# Altium PCB PCB2.PcbDoc
Units mm, origin at the board's own origin, x right, y up, seen from the top; angles counter-clockwise.
Board outline 62.64 x 44.93 mm, 2 copper layers (Top Layer, Bottom Layer), stack 1.1 mm thick; 47 components, 33 nets, 171 pads, 31 vias.
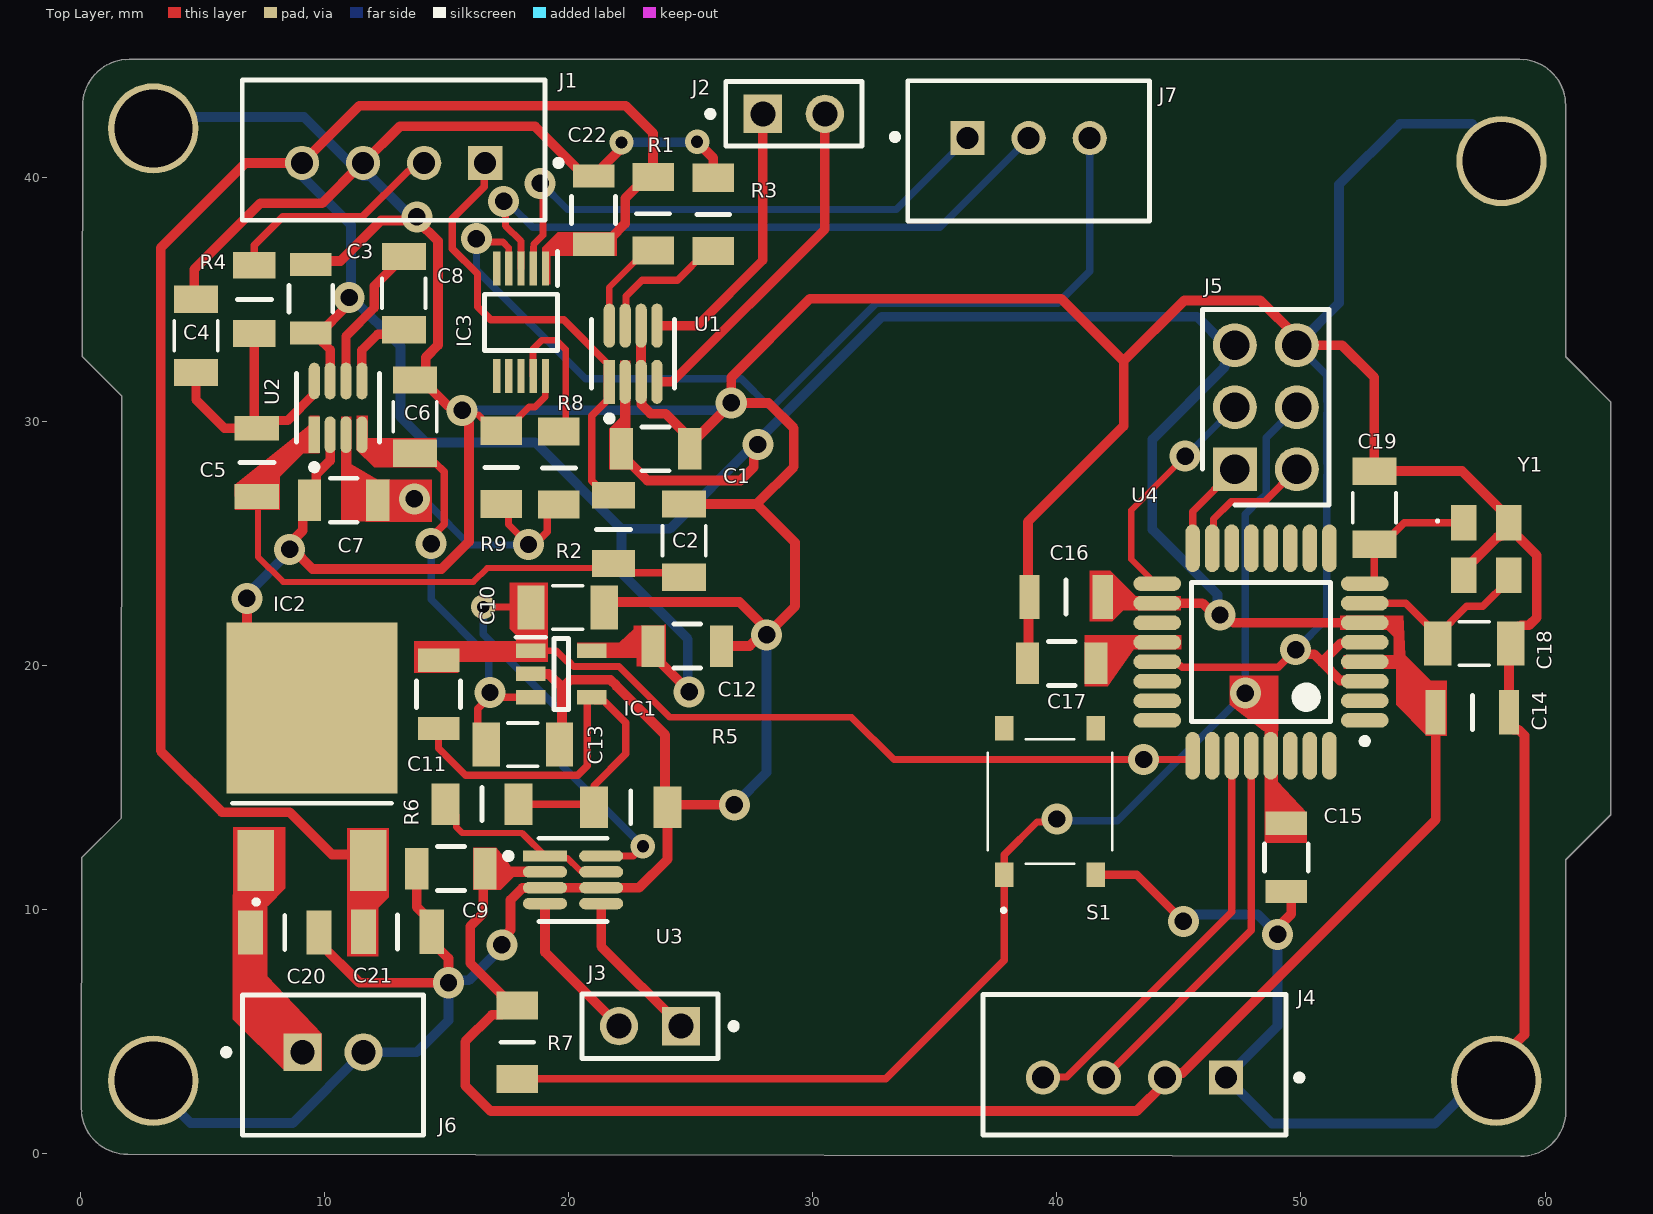
[diagram p0: Top Layer view]
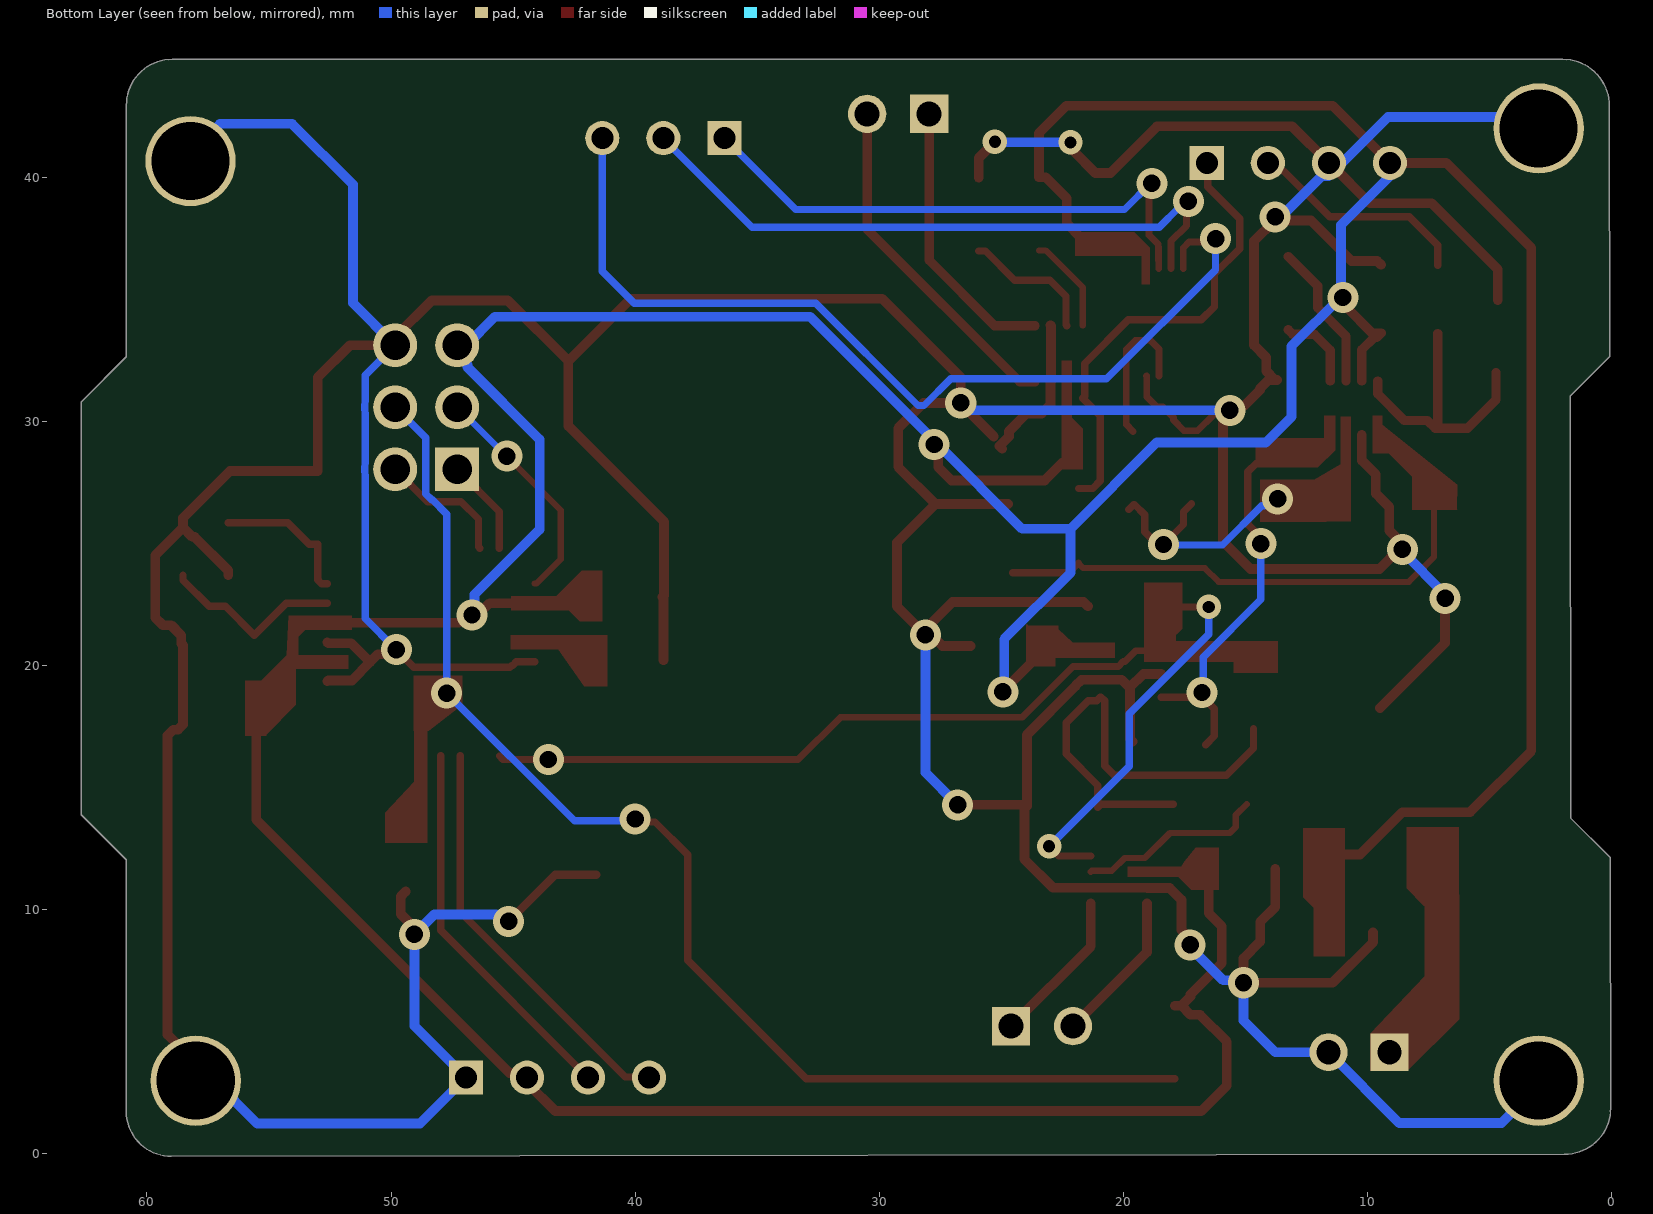
[diagram p1: Bottom Layer view, seen from below]
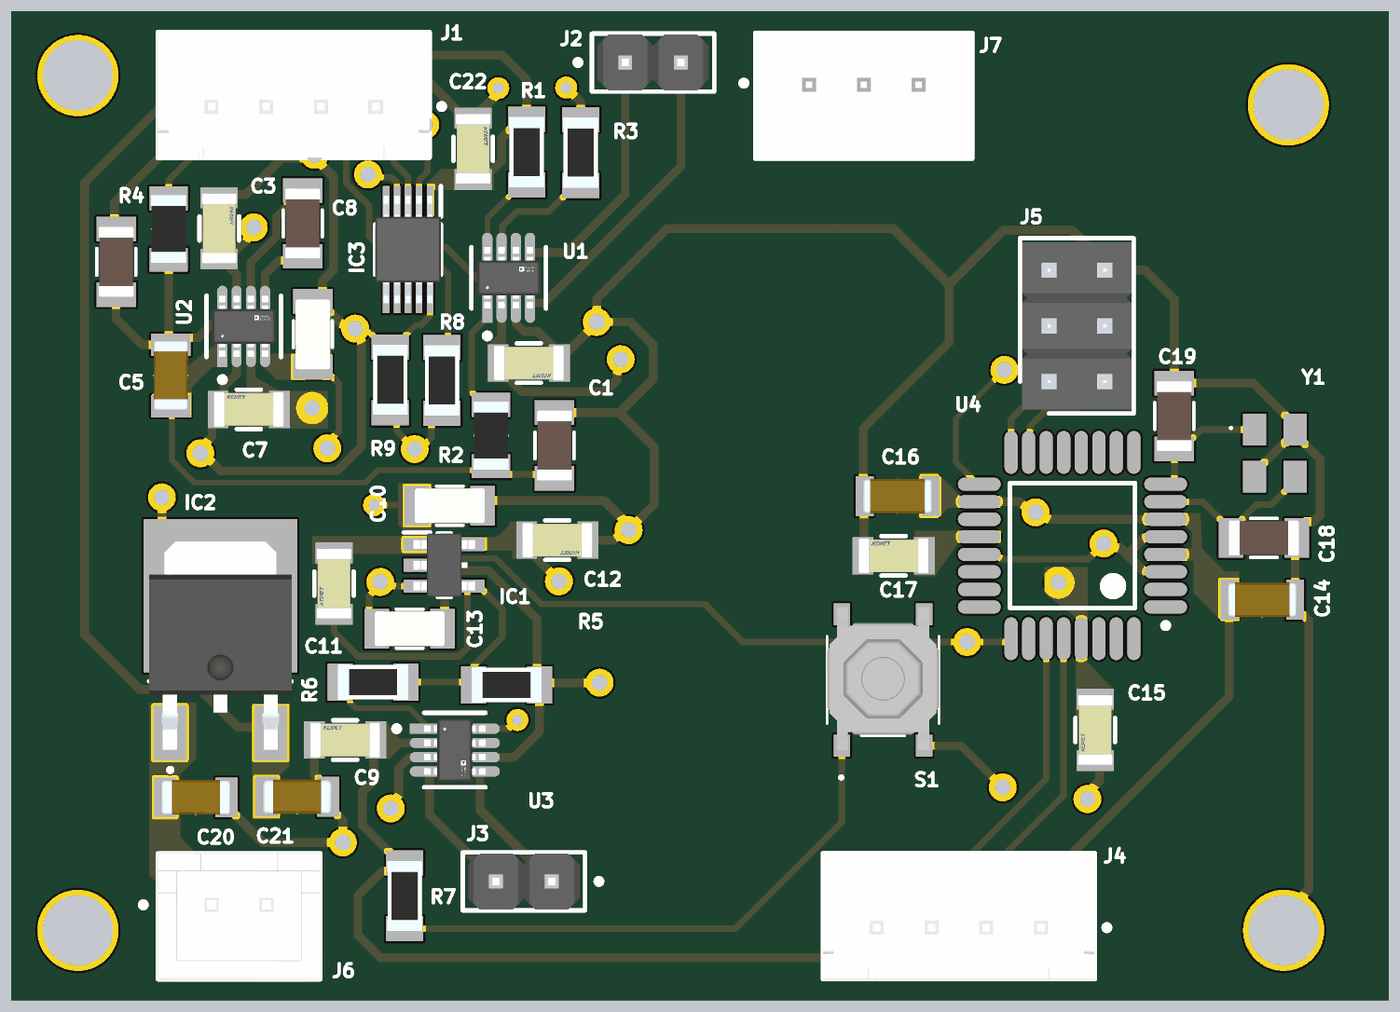
[diagram p2: 3D render of the assembled board from above, using the file's embedded part models]

## Layer stack, top to bottom
Top Solder: solder mask 0.05, Solder Resist, Dk 3.5
Top Layer: signal copper 0.1
Dielectric 1: dielectric 0.9, FR-4, Dk 4.8
Bottom Layer: signal copper 0.1
Bottom Solder: solder mask 0.05, Solder Resist, Dk 3.5

## Board outline
0.051,1.873 0.064,12.136 1.692,13.759 1.713,31.033 0.089,32.661 0.101,42.923 cw(c2.009,42.923) 2.009,44.831 16.247,44.831 44.723,44.831 58.961,44.831 cw(c58.961,42.948) 60.844,42.948 60.846,32.648 62.686,30.808 62.688,13.888 60.849,12.048 60.85,1.748 cw(c59.001,1.748) 59.001,-0.101 1.941,-0.017 cw(c1.941,1.873)

## Design rules (kind name [scope] priority, off if disabled: settings)
BoardOutlineClearance [All] p1: gap=0.2 ignorepadtopadclearanceinfootprint=FALSE except(0.4: Arc-SplitBarrior Arc-SplitContinuation Track-SplitBarrior Track-SplitContinuation SMDPad-SplitBarrior SMDPad-SplitContinuation THPad-SplitBarrior THPad-SplitContinuation Via-SplitBarrior Via-SplitContinuation Fill-SplitBarrior Fill-SplitContinuation Poly-SplitBarrior Poly-SplitContinuation Region-SplitBarrior Region-SplitContinuation Text-SplitBarrior Text-SplitContinuation)
Clearance "Clearance Bottom Layer" [OnLayer('Bottom Layer')] p1: gap=0.203 ignorepadtopadclearanceinfootprint=TRUE except(0.254: Arc-Text Track-Text SMDPad-Text THPad-Text Via-Text Fill-Text Poly-Text Region-Text Text-Text)
Clearance "Clearance Top Layer" [OnLayer('Top Layer')] p2: gap=0.203 ignorepadtopadclearanceinfootprint=TRUE except(0.254: Arc-Text Track-Text SMDPad-Text THPad-Text Via-Text Fill-Text Poly-Text Region-Text Text-Text)
Clearance [All] p3: gap=0.2 ignorepadtopadclearanceinfootprint=FALSE except(0.089: Arc-Arc Arc-Track Arc-SMDPad Track-Track Track-SMDPad SMDPad-SMDPad; 0.127: Arc-Via Track-Via SMDPad-Via THPad-Via Via-Via; 0.254: Arc-Text Track-Text SMDPad-Text THPad-Text Via-Text Fill-Text Poly-Text Region-Text Text-Text)
Clearance PowerNets [All vs InNet('GND')] p4: gap=15 ignorepadtopadclearanceinfootprint=FALSE
HoleSize [All] p1: absolutevalues=TRUE maxlimit=6.3 minlimit=0.2 maxpercent=80.000 minpercent=20.000
MinimumAnnularRing [All] p1: minimumring=0.076
MinimumSolderMaskSliver [All] p1: minsoldermaskwidth=0.1
PolygonConnect PolygonConnect_1 [All] p1: thpad.connectstyle=Relief thpad.reliefconductorwidth=0.508 thpad.reliefentries=4 thpad.polygonreliefangle="90 Angle" thpad.airgapwidth=0.254 smdpad.connectstyle=Relief smdpad.reliefconductorwidth=0.508 smdpad.reliefentries=4 smdpad.polygonreliefangle="90 Angle" smdpad.airgapwidth=0.254 via.connectstyle=Direct via.reliefconductorwidth=0.508 via.reliefentries=4 via.polygonreliefangle="90 Angle" via.airgapwidth=0.254
RoutingCorners [All] p1: cornerstyle=Round minsetback=2.54 maxsetback=2.54
RoutingVias [All] p1: holewidth=0.5 width=1 viastyle="Through Hole" minholewidth=0.2 minwidth=0.45 maxholewidth=1 maxwidth=2
SilkToSilkClearance [All] p1: silktosilkclearance=0.1
SilkToSolderMaskClearance [IsPad] p1: minsilkscreentomaskgap=0.1 clearancetoexposedcopper=TRUE
SolderMaskExpansion [All] p1: expansion=0.102 istentingtop=FALSE
SupplyNets "Schematic Supply Nets_3" [InNet('GND')] p1: voltage=0.000
SupplyNets "Schematic Supply Nets_2" [InNet('VCC')] p2: voltage=0.000
SupplyNets "Schematic Supply Nets_1" [InNet('VCC1')] p3: voltage=0.000
SupplyNets "Schematic Supply Nets" [InNet('REF')] p4: voltage=0.000
Width Width_PowerNets [InNetClass('PowerNets')] p1: maxlimit=0.4 minlimit=0.25 preferedwidth=0.35
Width [All] p2: maxlimit=2.54 minlimit=0.089 preferedwidth=0.381
25 further rules are at their usual default settings.

## Classes and differential pairs
net class PowerNets: GND VCC1
component class Offset: C22 IC3 J7 R8 R9
component class Power: C20 C21 IC2 J6
component class MicroController: C14 C15 C16 C17 C18 C19 J4 J5 R7 S1 U4 Y1
component class "Instrumentation amplifier": C3 C4 C5 C6 C7 C8 R4 U2
component class balancingBridge: C1 C2 J1 J2 R1 R2 R3 U1
component class Amplifier: C9 C10 C11 C12 C13 IC1 J3 R5 R6 U3

## Components (designator, comment, footprint, x,y, rotation, side; value= is the part's Value field where it differs from the comment)
C1 "0.1uF" FP-C1206C-EB-MFG 23.571,28.88 r180 top value="0.10 μF"
C2 "12063C224JAT2A" CAPC3216X94N 24.74,25.121 r270 top
C3 "0.1uF" FP-C1206C-EB-MFG 9.449,35.027 r270 top value="0.10 μF"
C4 "12063C224JAT2A" CAPC3216X94N 4.75,33.503 r270 top
C5 "12065C474JAT2A" CAPC3216X152N 7.239,28.321 r90 top
C6 "12063C334MAT2A" CAPC3216X127N 13.716,30.201 r270 top
C7 "0.1uF" FP-C1206C-EB-MFG 10.795,26.772 r0 top value="0.10 μF"
C8 "12063A4R7DAT2A" CAPC3216X94N 13.259,35.255 r270 top
C9 "0.1uF" FP-C1206C-EB-MFG 15.189,11.684 r0 top value="0.10 μF"
C10 "12063C334MAT2A" CAPC3216X127N 19.964,22.377 r0 top
C11 "0.1uF" FP-C1206C-EB-MFG 14.681,18.821 r90 top value="0.10 μF"
C12 "0.1uF" FP-C1206C-EB-MFG 24.867,20.803 r180 top value="0.10 μF"
C13 "12063C334MAT2A" CAPC3216X127N 18.136,16.764 r180 top
C14 "CGA5L1X7R1C106K160AC" CAPC3216X190N 57.023,18.085 r180 top
C15 "0.1uF" FP-C1206C-EB-MFG 49.403,12.144 r90 top value="0.10 μF"
C16 "CGA5L1X7R1C106K160AC" CAPC3216X190N 40.386,22.809 r0 top
C17 "0.1uF" FP-C1206C-EB-MFG 40.208,20.091 r0 top value="0.10 μF"
C18 "12063A220JAT2A" CAPC3216X94N 57.099,20.904 r180 top
C19 "12063A220JAT2A" CAPC3216X94N 53.01,26.467 r270 top
C20 "12063C105MAT2A" CAPC3216X178N 8.382,9.068 r180 top
C21 "12063D226MAT2A" CAPC3216X229N 13.005,9.093 r180 top
C22 "0.1uF" FP-C1206C-EB-MFG 21.031,38.659 r270 top value="0.10 μF"
IC1 "OPA336NA_3K" SOT95P280X145-5N 19.71,19.66 r0 top
IC2 "BD450M5FP-CE2" ROHM_TO-252-3 9.5,19.863 r0 top
IC3 "MCP4728-E_UN" SOP50P490X110-10N 18.059,34.061 r270 top
J1 "B4B-XH-A(LF)(SN)" FP-B4B-XH-A_LF_SN-MFG 12.843,41.114 r0 top
J2 "M20-9990246" FP-M20-9990246-MFG 29.235,42.596 r0 top
J3 "M20-9990246" FP-M20-9990246-MFG 23.343,5.232 r180 top
J4 "B4B-XH-A(LF)(SN)" FP-B4B-XH-A_LF_SN-MFG 43.185,3.649 r0 top
J5 "87914-0606" HDRV6W69P254_2X3_762X498X859P 47.295,28.042 r90 top
J6 "B2B-XH-A(LF)(SN)" FP-B2B-XH-A_LF_SN-MFG 10.358,3.641 r0 top
J7 "B3B-XH-A(LF)(SN)" FP-B3B-XH-A_LF_SN-MFG 38.851,41.08 r0 top
R1 "ERA-8AEB103V" RESC3216X70N 23.47,38.506 r270 top
R2 "CHP1206AFX-4701ELF" RESC3116X65N 21.844,25.578 r270 top
R3 "ERA-8AEB103V" RESC3216X70N 25.933,38.481 r270 top
R4 "CHP1206AFX-4701ELF" RESC3116X65N 7.137,34.998 r270 top
R5 "ERA8AEB102V" RESC3216X70N 22.555,14.199 r0 top
R6 "ERA-8AEB103V" RESC3216X70N 16.459,14.326 r0 top
R7 "ERA-8AEB103V" RESC3216X70N 17.907,4.572 r90 top
R8 "ERA-8AEB272V" RESC3216X70N 19.609,28.092 r270 top
R9 "ERA-8AEB103V" RESC3216X70N 17.247,28.119 r90 top
S1 "TS-1187A-B-A-B" TS1187ABAB 39.726,14.427 r90 top
U1 "AD5171BRJZ100-R2" FP-RJ-8-IPC_A 22.652,32.773 r90 top
U2 "AD8293G160ARJZ-R7" FP-RJ-8-IPC_B 10.566,30.556 r90 top
U3 "AD5171BRJZ100-R2" FP-RJ-8-IPC_A 20.193,11.227 r0 top
U4 "ATmega328P-AU" 32A_M 48.368,20.557 r180 top
Y1 "CX3225SA40000D0PTWCC" CX3225SA40000D0PTWCC 57.597,24.773 r270 top

## Footprints (in the part's own frame and the unit in brackets; to place one, negate y for a bottom-side part, rotate by r counter-clockwise, add the part's x,y. Pads: shape width x height; smd on the part's side, far side on the other; paste and mask are expansions set on the pad)
32A_M [mm] "Thin QFP, 32-Leads, Body 7x7mm, Pitch 0.8mm, IPC Low Density"
  oval 1.95x0.6 smd: 1(-4.25,2.8) 2(-4.25,2) 3(-4.25,1.2) 4(-4.25,0.4) 5(-4.25,-0.4) 6(-4.25,-1.2) 7(-4.25,-2) 8(-4.25,-2.8) 17(4.25,-2.8) 18(4.25,-2) 19(4.25,-1.2) 20(4.25,-0.4) 21(4.25,0.4) 22(4.25,1.2) 23(4.25,2) 24(4.25,2.8)
  oval 0.6x1.95 smd: 9(-2.8,-4.25) 10(-2,-4.25) 11(-1.2,-4.25) 12(-0.4,-4.25) 13(0.4,-4.25) 14(1.2,-4.25) 15(2,-4.25) 16(2.8,-4.25) 25(2.8,4.25) 26(2,4.25) 27(1.2,4.25) 28(0.4,4.25) 29(-0.4,4.25) 30(-1.2,4.25) 31(-2,4.25) 32(-2.8,4.25)
  silkscreen extent -4.38,-2.85 2.85,3.77, body extent -3.5,-3.5 3.5,3.5, height 1.2
CAPC3216X94N [mil]
  rect 44x71 smd: 1(-59,0) 2(59,0)
  silkscreen extent -24,-35 24,35, body extent -63,-31 63,31, height 37
CAPC3216X127N [mil]
  rect 44x71 smd: 1(-59,0) 2(59,0)
  silkscreen extent -24,-35 24,35, body extent -63,-31 63,31, height 71
CAPC3216X152N [mm]
  rect 1.02x1.82 smd: 1(-1.4,0) 2(1.4,0)
  silkscreen extent 0,-0.7 0,0.7, body extent -1.6,-0.8 1.6,0.8, height 1.52
CAPC3216X178N [mm]
  rect 1.02x1.82 smd: 1(-1.4,0) 2(1.4,0)
  silkscreen extent 0,-0.7 0,0.7, body extent -1.6,-0.8 1.6,0.8, height 1.78
CAPC3216X190N [mm]
  rect 0.82x1.82 smd: 1(-1.5,0) 2(1.5,0)
  silkscreen extent 0,-0.7 0,0.7, body extent -1.6,-0.8 1.6,0.8, height 1.9
CAPC3216X229N [mm]
  rect 1.02x1.82 smd: 1(-1.4,0) 2(1.4,0)
  silkscreen extent 0,-0.7 0,0.7, body extent -1.6,-0.8 1.6,0.8, height 2.29
CX3225SA40000D0PTWCC [mm]
  rect 1.45x1.05 smd: 1(-1.075,-0.925) 2(1.075,-0.925) 3(1.075,0.925) 4(-1.075,0.925)
  silkscreen extent -1.2,-2.05 -1.1,-1.95, body extent 0,0 0,0
FP-B2B-XH-A_LF_SN-MFG [mm]
  rect 1.55x1.55 hole 1 paste-2539.97 mask+0: 1(-1.25,0.525)
  round 1.55 hole 1 paste-2539.97 mask+0: 2(1.25,0.525)
  silkscreen extent -4.5,-2.88 3.7,2.88, body extent -3.8,-2.98 3.8,2.98, height 0.25
FP-B3B-XH-A_LF_SN-MFG [mm]
  rect 1.4x1.4 hole 0.9 paste-2539.97 mask+0: 1(-2.5,0.525)
  round 1.4 hole 0.9 paste-2539.97 mask+0: 2(0,0.525) 3(2.5,0.525)
  silkscreen extent -5.6,-2.88 4.95,2.88, body extent -5.05,-2.98 5.05,2.98, height 0.25
FP-B4B-XH-A_LF_SN-MFG [mm]
  rect 1.4x1.4 hole 0.9 paste-2539.97 mask+0: 1(3.75,-0.525)
  round 1.4 hole 0.9 paste-2539.97 mask+0: 2(1.25,-0.525) 3(-1.25,-0.525) 4(-3.75,-0.525)
  silkscreen extent -6.2,-2.88 6.88,2.88, body extent -6.3,-2.98 6.3,2.98, height 0.25
FP-C1206C-EB-MFG [mm]
  rect 0.95x1.7 smd paste+0 mask+0: 1(-1.4,0) 2(1.4,0)
  silkscreen extent -0.55,-0.9 0.55,0.9, body extent -2,-1 2,1, height 0.25
FP-M20-9990246-MFG [mm]
  rect 1.57x1.57 hole 1.02 paste-2539.97 mask+0: 1(-1.27,0)
  round 1.57 hole 1.02 paste-2539.97 mask+0: 2(1.27,0)
  silkscreen extent -3.55,-1.32 2.79,1.32, body extent -2.89,-1.42 2.89,1.42, height 0.25
FP-RJ-8-IPC_A [mm]
  rect 1.805x0.465 smd paste+0 mask+0: 1(-1.15,0.975)
  rrect100% 1.805x0.465 smd paste+0 mask+0: 2(-1.15,0.325) 3(-1.15,-0.325) 4(-1.15,-0.975) 5(1.15,-0.975) 6(1.15,-0.325) 7(1.15,0.325) 8(1.15,0.975)
  silkscreen extent -2.78,-1.7 1.4,1.7, body extent -2.55,-1.95 2.55,1.95, height 0.25
FP-RJ-8-IPC_B [mm]
  rect 1.505x0.455 smd paste+0 mask+0: 1(-1.1,0.975)
  rrect100% 1.505x0.455 smd paste+0 mask+0: 2(-1.1,0.325) 3(-1.1,-0.325) 4(-1.1,-0.975) 5(1.1,-0.975) 6(1.1,-0.325) 7(1.1,0.325) 8(1.1,0.975)
  silkscreen extent -2.55,-1.7 1.4,1.7, body extent -2.1,-1.7 2.1,1.7, height 0.25
HDRV6W69P254_2X3_762X498X859P [mm]
  rect 1.8x1.8 hole 1.2: 1(0,0)
  round 1.8 hole 1.2: 2(0,-2.54) 3(2.54,0) 4(2.54,-2.54) 5(5.08,0) 6(5.08,-2.54)
  silkscreen extent -1.46,-3.86 6.54,1.32, body extent -1.27,-3.76 6.35,1.22, height 8.59
RESC3116X65N [mm]
  rect 1.1x1.75 smd: 1(-1.4,0) 2(1.4,0)
  silkscreen extent 0,-0.7 0,0.7, body extent -1.55,-0.8 1.55,0.8, height 0.65
RESC3216X70N [mm]
  rect 1.15x1.7 smd: 1(-1.5,0) 2(1.5,0)
  silkscreen extent 0,-0.67 0,0.67, body extent -1.6,-0.8 1.6,0.8, height 0.6
ROHM_TO-252-3 [mm]
  rect 1.5x2.5 smd: 1(-2.3,-7.85) 2(2.3,-7.85)
  rect 7x7 smd: 3(0,-1.6)
  silkscreen extent -3.25,-9.63 3.25,-5.5, body extent -3.25,-8.62 3.25,0.88, height 2.3
SOP50P490X110-10N [mm]
  rect 1.4x0.3 smd: 1(-2.2,1) 2(-2.2,0.5) 3(-2.2,0) 4(-2.2,-0.5) 5(-2.2,-1) 6(2.2,-1) 7(2.2,-0.5) 8(2.2,0) 9(2.2,0.5) 10(2.2,1)
  silkscreen extent -2.9,-1.5 1.15,1.5, body extent -2.45,-1.5 2.45,1.5, height 1.1
SOT95P280X145-5N [mm]
  rect 1.2x0.6 smd: 1(-1.25,0.95) 2(-1.25,0) 3(-1.25,-0.95) 4(1.25,-0.95) 5(1.25,0.95)
  silkscreen extent -1.85,-1.45 0.3,1.5, body extent -1.4,-1.45 1.4,1.45, height 1.2
TS1187ABAB [mm]
  rect 1x0.75 smd: A1(-3,1.875) B1(3,1.875) C1(-3,-1.875) D1(3,-1.875)
  silkscreen extent -4.5,-2.55 2.55,2.55, body extent -3.2,-2.55 3.3,2.55, height 1.5

## Part data
C1 C3 C7 C9 C11 C12 C15 C17 C22: library part CMP-1037-04186-2, "CAP CER 0.1UF 25V C0G/NP0 1206", Capacitance="0.10 μF", Manufacturer=KEMET, Manufacturer Part Number=C1206C104F3GACTU, Package=C1206C-EB, Temperature="-55°C to +150°C", Temperature Characteristic=C0G, Temperature Coefficient=15%, Temperature Range High=+150°C, Temperature Range Low=-55°C, Tolerance=0.01, Voltage Rating="25 V", Automotive=Yes, Automotive Grade="Grade 0", Category=Cap, ComponentLink2Description=Datasheet, ComponentLink2URL=https://content.kemet.com/datasheets/KEM_C1007_X8R_ULTRA_150C_SMD.pdf, Device Class L1="Passive Components", Device Class L2=Capacitors, Device Class L3="Ceramic Capacitors", Digikey Description="CAP CER 0.1UF 25V C0G/NP0 1206", Height=0.88mm, Ipc Land Pattern Name=CAPC320160X78, Lead Free=Yes, Material=Ceramic, Mouser Description="Multilayer Ceramic Capacitors MLCC - SMD/SMT 25volts 0.1uF 1% C0G", Octopart=https://octopart.com/c1206c104f3gactu-kemet-13149870, RoHS=TRUE
C2 C4: "Capacitor", Manufacturer_Name="Kyocera AVX", Mouser Part Number=581-12063C224JAT2A, Arrow Part Number=12063C224JAT2A, Arrow Price/Stock=https://www.arrow.com/en/products/12063c224jat2a/avx, Manufacturer_Part_Number=12063C224JAT2A, Parameter 1=0.22uF
C5: "Capacitor", Manufacturer_Name="Kyocera AVX", Mouser Part Number=581-12065C474J, Datasheet Link=https://spicat.kyocera-avx.com/product/mlcc/chartview/12065C474JAT2A/DataSheet/X7R, Height=1.52mm, Manufacturer_Part_Number=12065C474JAT2A, Mouser Price/Stock=https://www.mouser.co.uk/ProductDetail/AVX/12065C474JAT2A?qs=JKNO%252BtokWhWmgS3PHs6ZAg%3D%3D, Parameter 1=470nF
C6 C10 C13: "Capacitor", Manufacturer_Name="Kyocera AVX", Mouser Part Number=581-12063C334MAT2A, Manufacturer_Part_Number=12063C334MAT2A, Mouser Price/Stock=https://www.mouser.co.uk/ProductDetail/AVX/12063C334MAT2A?qs=UY55afH%252BLTTA4%2F7p5aIkng%3D%3D, Parameter 1=0.33uF
C8: "Capacitor", Manufacturer_Name="Kyocera AVX", Mouser Part Number=581-12063A4R7DAT2A, Datasheet Link=https://spicat.kyocera-avx.com/product/mlcc/chartview/12063A4R7DAT2A/DataSheet/NP0, Height=0.94mm, Manufacturer_Part_Number=12063A4R7DAT2A, Mouser Price/Stock=https://www.mouser.com/Search/Refine.aspx?Keyword=581-12063A4R7DAT2A, Parameter 1=4.7pF
C14 C16: "Capacitor", Manufacturer_Name=TDK, Mouser Part Number=810-CGA5L1X7R1C106KC, Arrow Part Number=CGA5L1X7R1C106K160AC, Arrow Price/Stock=https://www.arrow.com/en/products/cga5l1x7r1c106k160ac/tdk, Datasheet Link=http://docs-europe.electrocomponents.com/webdocs/14e9/0900766b814e9125.pdf, Height=1.9mm, Manufacturer_Part_Number=CGA5L1X7R1C106K160AC, Mouser Price/Stock=https://www.mouser.co.uk/ProductDetail/TDK/CGA5L1X7R1C106K160AC?qs=xLDY6iXSiQYs%2FbZYg2RcKQ%3D%3D
  C14: Parameter 2=10uF
  C16: Parameter 1=10uF
C18 C19: "Capacitor", Manufacturer_Name="Kyocera AVX", Mouser Part Number=581-12063A220JAT2A, Arrow Part Number=12063A220JAT2A, Arrow Price/Stock=https://www.arrow.com/en/products/12063a220jat2a/avx, Manufacturer_Part_Number=12063A220JAT2A, Mouser Price/Stock=https://www.mouser.com/Search/Refine.aspx?Keyword=581-12063A220JAT2A, Parameter 1=22pF
C20: "Capacitor", Manufacturer_Name="Kyocera AVX", Mouser Part Number=581-12063C105MAT2A, Arrow Part Number=12063C105MAT2A, Arrow Price/Stock=https://www.arrow.com/en/products/12063c105mat2a/avx, Datasheet Link=https://spicat.kyocera-avx.com/product/mlcc/chartview/12063C105MAT2A/DataSheet/X7R, Height=1.78mm, Manufacturer_Part_Number=12063C105MAT2A, Mouser Price/Stock=https://www.mouser.com/Search/Refine.aspx?Keyword=581-12063C105MAT2A, Parameter 1=1uF
C21: "Capacitor", Manufacturer_Name="Kyocera AVX", Mouser Part Number=581-12063D226MAT2A, Arrow Part Number=12063D226MAT2A, Arrow Price/Stock=https://www.arrow.com/en/products/12063d226mat2a/avx?region=nac, Datasheet Link=https://rs.componentsearchengine.com/Datasheets/1/12063D226MAT2A.pdf, Height=2.29mm, Manufacturer_Part_Number=12063D226MAT2A, Mouser Price/Stock=https://www.mouser.co.uk/ProductDetail/KYOCERA-AVX/12063D226MAT2A?qs=q%252BHV0zBR8MiKBGAgbZK5Jw%3D%3D, Parameter 1=22uF
IC1: "Integrated Circuit", Arrow Part Number=OPA336NA/3K, Manufacturer_Name="Texas Instruments", Mouser Part Number=595-OPA336NA/3K, Arrow Price/Stock=https://www.arrow.com/en/products/opa336na3k/texas-instruments?region=nac, Datasheet Link=http://www.ti.com/lit/gpn/OPA336, Height=1.45mm, Manufacturer_Part_Number=OPA336NA/3K, Mouser Price/Stock=https://www.mouser.co.uk/ProductDetail/Texas-Instruments/OPA336NA-3K?qs=7nS3%252BbEUL6vwF%252Byt2%2F21Rw%3D%3D
IC2: "Integrated Circuit", Manufacturer_Name="ROHM Semiconductor", Mouser Part Number=755-BD450M5FP-CE2, Datasheet Link=https://datasheet.datasheetarchive.com/originals/distributors/DKDS-10/186386.pdf, Manufacturer_Part_Number=BD450M5FP-CE2, Mouser Price/Stock=https://www.mouser.co.uk/ProductDetail/ROHM-Semiconductor/BD450M5FP-CE2?qs=zGux8KhMp6L1UcqyCxjOAw%3D%3D
IC3: "Integrated Circuit", Arrow Part Number=MCP4728-E/UN, Manufacturer_Name=Microchip, Mouser Part Number=579-MCP4728-E/UN, Arrow Price/Stock=https://www.arrow.com/en/products/mcp4728-eun/microchip-technology?region=nac, Datasheet Link=http://ww1.microchip.com/downloads/en/DeviceDoc/22187E.pdf, Height=1.1mm, Manufacturer_Part_Number=MCP4728-E/UN, Mouser Price/Stock=https://www.mouser.co.uk/ProductDetail/Microchip-Technology/MCP4728-E-UN?qs=E6wAi2XWqcP2zTenScklGA%3D%3D
J1 J4: library part CMP-17439-000250-1, "CONN HEADER VERT 4POS 2.5MM", Color=Natural, Contact Resistance=20mR, Current Rating=3A, Flammability Rating="UL94 V-0", Housing Color=White, Insulation Resistance=1GR, Max Operating Temperature=85°C, Max Voltage Rating (AC)=250V, Min Operating Temperature=-25°C, Package Quantity=500, Connector Type=Header, Contact Finish - Mating=TIN, Contact Material=Brass, Contact Plating=Tin, Contact Shape=Square, Contact Type="Male Pin", Depth=5.75mm, Fastening Type=Detent, Gender=Male, Housing Material=Polyamide, Insulation Color=Natural, Insulation Material=Nylon, Lead Free="Lead Free", Lead Pitch=2.5mm, Length=12.4mm, Mated Stacking Heights=9.8mm, Material=Polyamide, Max Current Rating=3A, Max Voltage Rating (DC)=250V, Mount="Through Hole", Number of Contacts=4, Number of Positions=4, Number of Rows=1, Orientation=Straight, Packaging=Bulk, Pitch=2.5mm, REACH SVHC="No SVHC", Series=XH, Termination=Solder, Voltage Rating=250V, Voltage Rating (AC)=250V, Wire/Cable Gauge=22AWG
J2 J3: library part CMP-15831-000009-1, "CONN HEADER VERT 2POS 2.54MM", Current Rating=3A, Manufacturer=Harwin, Temperature="-40°C to +105°C", Temperature Range High=+105°C, Temperature Range Low=-40°C, Automotive=No, Category=Conn, ComponentLink2Description=Datasheet, ComponentLink2URL=https://cdn.harwin.com/pdfs/M20-999.pdf, Conn Gender=Male, Conn Orientation=Vertical, Contact Material=Tin,Nickel, Device Class L1=Connectors, Device Class L2="Headers and Wire Housings", Device Class L3=unset, Digikey Description="CONN HEADER VERT 2POS 2.54MM", Height=8.99mm, Lead Free=Yes, Manufacturer Part Number=M20-9990246, Mouser Description="2.54mm (0.1\") Pitch SIL Vertical PC Tail Pin Header, 6.1mm mating pin height, tin, 2 contacts", Number of Contacts=2, Number of Rows=1, Octopart=https://octopart.com/m20-9990246-harwin-2590635, Package=M20-9990246, Pitch=2.54mm, RoHS=TRUE
J5: "Connector", Manufacturer_Name=Molex, Mouser Part Number=538-87914-0606, Datasheet Link=https://www.molex.com/content/dam/molex/molex-dot-com/products/automated/en-us/salesdrawingpdf/879/87914/879140606_sd.pdf, Height=8.59mm, Manufacturer_Part_Number=87914-0606, Mouser Price/Stock=https://www.mouser.co.uk/ProductDetail/Molex/87914-0606?qs=y2iaK3rfSTnIsAUr2bgTSw%3D%3D
J6: library part CMP-2000-05888-3, "CONN HEADER VERT 2POS 2.5MM", Color=Natural, Contact Resistance=20mR, Current Rating=3A, Housing Color=White, Insulation Resistance=1GR, Max Operating Temperature=85°C, Max Voltage Rating (AC)=250V, Min Operating Temperature=-25°C, Connector Type="Male Pin", Contact Material=Brass, Contact Plating=Tin, Contact Type="Male Pin", Depth=5.75mm, Fastening Type=Detent, Housing Material=Polyamide, Lead Free="Lead Free", Lead Pitch=2.5mm, Length=7.4mm, Max Current Rating=3A, Max Voltage Rating (DC)=250V, Mount="Through Hole", Number of Contacts=2, Number of Positions=2, Number of Rows=1, Orientation=Straight, Packaging=Bulk, Pitch=2.5mm, REACH SVHC="No SVHC", Series=XH, Termination=Solder, Voltage Rating=250V, Voltage Rating (AC)=250V, Wire/Cable Gauge=22AWG
J7: library part CMP-17439-000014-3, "CONN HEADER VERT 3POS 2.5MM", Color=Natural, Contact Resistance=20mR, Current Rating=3A, Flammability Rating="UL94 V-0", Housing Color=White, Insulation Resistance=1GR, Max Operating Temperature=85°C, Max Voltage Rating (AC)=250V, Min Operating Temperature=-25°C, Connector Type=Header, Contact Finish - Mating=TIN, Contact Material=Brass, Contact Plating=Tin, Contact Shape=Square, Contact Type="Male Pin", Depth=5.75mm, Fastening Type=Detent, Gender=Male, Housing Material=Polyamide, Insulation Color=Natural, Insulation Material=Nylon, Lead Free="Lead Free", Lead Pitch=2.5mm, Length=9.9mm, Max Current Rating=3A, Max Voltage Rating (DC)=250V, Mount="Through Hole", Number of Contacts=3, Number of Positions=3, Number of Rows=1, Orientation=Straight, Packaging=Bulk, Pitch=2.5mm, REACH SVHC="No SVHC", Series=XH, Termination=Solder, Voltage Rating=250V, Voltage Rating (AC)=250V, Wire/Cable Gauge=22AWG
R1 R3 R6 R7 R9: "Resistor", Manufacturer_Name=Panasonic, Mouser Part Number=667-ERA-8AEB103V, Arrow Part Number=ERA-8AEB103V, Arrow Price/Stock=https://www.arrow.com/en/products/era8aeb103v/panasonic?region=europe, Datasheet Link=https://industrial.panasonic.com/cdbs/www-data/pdf/RDM0000/AOA0000C307.pdf, Height=0.7mm, Manufacturer_Part_Number=ERA-8AEB103V, Mouser Price/Stock=https://www.mouser.co.uk/ProductDetail/Panasonic/ERA-8AEB103V?qs=Ojoo2rCVP9QscDrGu5R0Gw%3D%3D
  R1 R6 R7 R9: Parameter 1=10k
  R3: Parameter 1=10K
R2 R4: "Resistor", Manufacturer_Name=Bourns, Mouser Part Number=652-CHP1206AFX-4701L, Datasheet Link=https://www.mouser.be/datasheet/2/54/chp-a-1858677.pdf, Height=0.65mm, Manufacturer_Part_Number=CHP1206AFX-4701ELF, Mouser Price/Stock=https://www.mouser.co.uk/ProductDetail/Bourns/CHP1206AFX-4701ELF?qs=GedFDFLaBXHtzjpWW2eupA%3D%3D, Parameter 1=4.7k
R5: "Resistor", Manufacturer_Name=Panasonic, Arrow Part Number=ERA8AEB102V, Arrow Price/Stock=https://www.arrow.com/en/products/era-8aeb102v/panasonic, Datasheet Link=https://industrial.panasonic.com/cdbs/www-data/pdf/RDM0000/AOA0000C307.pdf, Height=0.7mm, Manufacturer_Part_Number=ERA8AEB102V, Parameter 1=1K
R8: "Resistor", Manufacturer_Name=Panasonic, Mouser Part Number=667-ERA-8AEB272V, Datasheet Link=https://industrial.panasonic.com/cdbs/www-data/pdf/RDM0000/AOA0000C307.pdf, Height=0.7mm, Manufacturer_Part_Number=ERA-8AEB272V, Mouser Price/Stock=https://www.mouser.com/Search/Refine.aspx?Keyword=667-ERA-8AEB272V, Parameter 1=2.7k
S1: "Switch", Manufacturer_Name="XKB Connectivity", Datasheet Link=http://www.helloxkb.com/public/images/pdf/TS-1187A-X-X-X.pdf, Height=4.05mm, Manufacturer_Part_Number=TS-1187A-B-A-B
U1 U3: library part CMP-00026-00446399-1, "AD5171BRJZ100-R2 Digital Potentiometer 64POS 100kOhm Single Automotive 8-Pin SOT-23 T/R", Case/Package=SOT-23, Frequency=400kHz, Manufacturer Lifecycle Status=PRODUCTION, Max Junction Temperature (Tj)=150°C, Max Operating Temperature=125°C, Max Supply Current=4µA, Max Supply Voltage=5.5V, Min Operating Temperature=-40°C, Min Supply Voltage=2.7V, Resistance=100kΩ, Temperature Coefficient=35ppm/°C, Tolerance=30%, -3db Bandwidth=1.5MHz, Contact Plating=Gold, Height=1.3mm, Interface=I2C, Lead Free="Contains Lead", Length=2.9mm, Lifecycle Status=Production, Memory Type="Non-Volatile, Volatile", Mount="Surface Mount", NexarPartId=446399, Nominal Supply Current=4µA, Number of Circuits=1, Number of Elements=1, Number of Pins=8, Number of Positions=64, Number of Taps=64, Operating Supply Current=4µA, Operating Supply Voltage=5.5V, Packaging="Cut Tape", Quiescent Current=4µA, REACH SVHC="No SVHC", RoHS=Compliant, Schedule B="8542390000, 8542390000", Taper=Linear, Width=1.6mm
U2: library part CMP-09116-000116-1, "IC INST AMP 1 CIRCUIT SOT23-8", Case/Package=SOT, Input Bias Current=2nA, Input Offset Voltage (Vos)=50uV, Input Resistance=10GR, Max Operating Temperature=85°C, Max Supply Current=1.5mA, Max Supply Voltage=5.5V, Min Operating Temperature=-40°C, Min Supply Voltage=1.8V, Operating Supply Current=1.3mA, Output Current per Channel=35mA, Package Quantity=3000, Power Supply Rejection Ratio (PSRR)=94dB, -3db Bandwidth=500Hz, Amplifier Type="INSTRUMENTATION AMPLIFIER", Common Mode Rejection Ratio=140dB, Contact Plating=Gold, Gain Bandwidth Product=500Hz, Height=1.3mm, Lead Free="Contains Lead", Length=2.9mm, Mount="Surface Mount", Number of Amplifiers=1, Number of Channels=1, Number of Circuits=1, Number of Elements=1, Number of Pins=8, Packaging="Tape and Reel", REACH SVHC="No SVHC", RoHS Compliant=Yes, Series=-, Width=1.6mm
U4: library part CMP-0095-00269-2, "8-bit AVR Microcontroller, 32KB Flash, 1KB EEPROM, 2KB SRAM, 32-pin TQFP, Industrial Grade (-40°C to 85°C)", Code_JEDEC=MS-026-ABA, ComponentLink1Description="Manufacturer URL", ComponentLink1URL=http://www.atmel.com/, ComponentLink2Description="ATmega48A/48PA/88A/88PA/168A/168PA/328/328P Datasheet", ComponentLink2URL=http://www.atmel.com/dyn/resources/prod_documents/doc8271.pdf, ComponentLink3Description="ATmega48A/48PA/88A/88PA/168A/168PA/328/328P Summary", ComponentLink3URL=http://www.atmel.com/dyn/resources/prod_documents/8271S.pdf, DatasheetVersion="revD, May-2011", PackageDescription="32-Lead, 7x7x1.0 mm Body, 0.8mm Lead Pitch, Thin Profile Plastic Quad Flat Package (TQFP)", PackageReference=32A, PackageVersion="revC, Oct-2010", RevisionNote="DatasheetVersion & PackageVersion updated. URLs added."
Y1: "Crystal or Oscillator", Manufacturer_Name=KYOCERA, Mouser Part Number=581-CX3225SA40D0PTWC, Arrow Part Number=CX3225SA40000D0PTWCC, Arrow Price/Stock=https://www.arrow.com/en/products/cx3225sa40000d0ptwcc/kyocera, Datasheet Link=https://media.digikey.com/pdf/Data%20Sheets/Kyocera%20International/CX3225SA40000D0PTWCC_DS.pdf, Height=0.8mm, Manufacturer_Part_Number=CX3225SA40000D0PTWCC, Mouser Price/Stock=https://www.mouser.co.uk/ProductDetail/KYOCERA-AVX/CX3225SA40000D0PTWCC?qs=HuCFcgRyUKhyUGYK%2FnO9Bw%3D%3D

## Free pads (board coordinates)
  round 3.7 hole 3.2: 6(3,3) 6(3,42) 6(58,3) 6(58.217,40.665)

## Via types
v1: diameter 1.27, hole 0.711, Top Layer to Bottom Layer, 27 vias
v2: diameter 1, hole 0.5, Top Layer to Bottom Layer, 4 vias

## Nets (pads, with @x,y where several pads share a name; then routed paths per layer and width w, separated by ;. In a path a pad name is that pad's centre, name@x,y a point inside that pad or via, vN(x,y) a via of type N, cw(c..) or ccw(c..) an arc to the next point about the centre after c; other vN are vias at no path point)
"Amplifier Input": C10.1 C11.2 IC1.1 U3.8 U4.25 | length 45.4
  Top Layer w0.28: IC1.1 19.497,20.61 19.939,20.168 20.017,20.168 20.218,19.966 22.071,19.966 24.155,17.882 31.605,17.882 33.332,16.154 v1(43.561,16.154) 45.429,16.154 45.568,16.293 U4.25
  Top Layer w0.3: v2(16.51,22.403) 18.44,22.403 C10.1 ; U3.8 22.653,12.202 v2(23.05,12.598)
  Bottom Layer w0.3: v2(16.51,22.403) 16.51,21.285 19.764,18.031 19.764,15.884 v2(23.05,12.598)
Bridge_Other: J1.2 R4.1 | length 9.2
  Top Layer w0.3: R4.1 7.138,37.222 8.295,38.379 11.557,38.379 13.417,40.239 13.446,40.239 13.796,40.589 J1.2
GND: C1.1 C2.1 C3.1 C4.1 C6.1 C7.1 C9.1 C10.2 C12.1 C13.1 C14.1 C15.1 C16.1 C17.1 C18.1 C19.1 C20.1 C21.1 C22.1 IC1.2 IC2.3 IC3.10 J1.3 J4.1 J5.6 J6.2 pad.6 R3.1 R5.2 R9.2 S1.C1 U1.3 U1.6 U2.2 U3.3 U3.6 U4.3 U4.5 U4.21 Y1.2 Y1.4 | length 347.7
  Top Layer w0.28: 16.322,30.269 16.972,29.619 R9.2 17.522,29.619 17.957,30.054 17.957,30.165 18.384,30.592 18.626,30.592 19.053,31.019 19.053,31.855 IC3.10
  Top Layer w0.3: U4.21 44.874,20.157 45.024,20.007 45.066,20.007 45.137,19.937 49.07,19.937 v1(49.784,20.65) v1@49.968,20.467
  Top Layer w0.35: S1.C1 43.284,11.427 v1(45.187,9.525)
  Top Layer w0.4: C4.1@4.674,34.979 4.674,36.22 7.391,38.938 8.643,38.938 8.645,38.936 9.908,38.936 J1.3@11.495,40.523 ; v1(6.833,22.758) 6.833,20.93 IC2.3 ; C3.1@9.458,36.418 9.612,36.572 10.664,36.572 12.322,38.23 v1@13.642,38.23 ; C20.1 9.782,8.668 11.439,7.01 v1(15.088,7.01) 15.088,8.01 14.405,8.693 C21.1 14.405,9.493 13.789,10.109 C9.1 ; U2.2 10.241,28.402 9.67,27.831 9.67,27.047 C7.1 9.12,26.497 9.12,25.535 8.585,25 v1(8.585,24.765) 8.713,24.765 9.522,23.955 14.806,23.955 15.926,25.075 v1@15.926,29.94 ; J1.3 13.092,42.088 18.627,42.088 20.381,40.334 20.535,40.18 C22.1@21.159,40.18 ; C6.1 C6.1@13.798,31.699 ; v1@13.792,38.218 13.825,38.218 14.656,37.388 14.656,33.123 14.157,32.624 14.157,32.058 C6.1@13.798,31.699 ; v1@15.085,30.621 14.418,31.289 14.418,31.34 14.059,31.699 C6.1@13.798,31.699 ; v1(17.272,8.56) 17.272,8.795 17.618,9.141 17.618,9.16 17.628,9.169 17.628,10.406 18.111,10.889 19.03,10.889 U3.3 U3.6 22.891,10.902 24.055,12.066 R5.2 24.157,14.3 v1(26.797,14.3) ; IC1.2 19.189,19.66 19.755,19.094 ; C13.1@19.634,16.891 19.736,16.993 19.736,19.075 19.755,19.094 ; C22.1@21.16,40.181 22.059,41.08 22.059,41.313 v2(22.174,41.427) ; C10.2@21.463,22.428 21.641,22.606 27.007,22.606 28.118,21.495 v1(28.118,21.26) ; U1.6@22.989,33.936 U1.6 U1.3 22.989,31.611 22.989,30.691 23.363,30.317 23.978,30.317 24.696,29.599 24.696,29.382 25.078,29 C1.1 ; R5.2@23.954,14.249 23.954,17.169 21.964,19.159 21.964,19.177 21.727,19.413 21.71,19.413 21.699,19.423 20.084,19.423 19.755,19.094 ; C2.1 27.711,26.619 ; v2(25.273,41.453) 25.933,40.792 R3.1 ; C1.1@25.318,29.379 v1@26.67,30.731 ; C12.1 27.425,20.803 27.882,21.26 v1(28.118,21.26) ; C17.1@38.846,20.218 38.846,22.769 C16.1 38.824,22.871 38.824,25.895 42.742,29.813 42.742,32.468 ; v1(49.047,8.992) 49.047,9.267 49.606,9.825 49.606,10.541 C15.1 ; v1@49.968,20.467 50.495,20.467 ; 50.535,20.467 50.862,20.139 51.606,19.395 52.579,19.395 U4.3 ; 50.89,20.168 51.641,20.919 52.579,20.919 U4.5 ; Y1.2 56.672,23.898 58.047,25.273 58.147,25.273 Y1.4@58.522,25.648 ; pad.6@58,3 58,3.728 59.157,4.884 59.157,17.14 58.922,17.375 58.733,17.375 58.523,17.585 C18.1@58.523,20.829 ; C18.1 58.598,21.244 59.007,21.653 59.346,21.653 59.665,21.971 59.665,24.505 Y1.4@58.522,25.648 ; 27.711,26.619 29.286,25.044 29.286,22.428 v1(28.118,21.26) ; 27.711,26.619 29.232,28.14 29.232,29.721 28.194,30.759 v1(26.67,30.759) 26.67,31.801 29.896,35.027 40.183,35.027 42.742,32.468 ; 42.742,32.468 45.225,34.95 48.336,34.95 49.835,33.452 J5.6 51.689,33.122 53.01,31.801 C19.1 56.604,27.965 58.522,26.048 Y1.4 Y1.4@58.522,25.648
  Bottom Layer w0.3: v1(49.784,20.65) 51.065,21.931 51.065,27.775 cw(c51.365,27.774) 51.069,27.825 ccw(c49.835,28.042) 51.069,28.259 cw(c51.365,28.309) 51.065,28.307 51.065,30.315 cw(c51.365,30.314) 51.069,30.363 51.069,30.364 ccw(c49.835,30.582) 51.069,30.799 cw(c51.365,30.849) 51.065,30.847 51.065,31.892 J5.6
  Bottom Layer w0.4: pad.6@2.921,42.215 3.175,42.469 9.172,42.469 11.602,40.039 11.904,40.039 13.564,38.379 v1(13.792,38.379) ; pad.6@3,3 3,2.797 4.527,1.27 8.712,1.27 J6.2 13.792,4.166 15.088,5.461 v1(15.088,7.01) 15.189,7.112 15.92,7.112 17.272,8.464 v1(17.272,8.56) ; v1(6.833,22.758) 6.833,22.918 8.585,24.67 v1(8.585,24.765) ; v1(15.646,30.455) 26.365,30.455 v1(26.67,30.759) ; v2(22.174,41.427) 22.187,41.44 25.26,41.44 v2(25.273,41.453) ; v1(26.797,14.3) 28.118,15.621 v1(28.118,21.26) ; v1(45.187,9.525) 45.422,9.525 45.701,9.804 48.235,9.804 v1(49.047,8.992) 49.047,5.236 J4.1 48.815,1.245 55.485,1.245 57.241,3 pad.6@58,3 ; J5.6 51.562,34.849 51.562,39.7 54.051,42.189 57.005,42.189 pad.6@57.246,41.949
IA_Input: C6.2 C13.2 IC1.3 U2.4 | length 16.1
  Top Layer w0.3: C6.2@13.564,28.702 13.972,28.293 14.557,28.293 14.91,27.94 14.91,25.789 14.376,25.256 v1(14.376,24.994) ; C13.2 16.281,17.12 16.281,18.237 16.789,18.745 v1(16.789,18.898) ; v1@16.866,18.821 17.128,18.821 17.24,18.71 IC1.3
  Bottom Layer w0.3: v1(14.376,24.994) 14.376,22.707 16.741,20.342 16.741,18.946 v1(16.789,18.898)
MISO: J5.1 U4.16 | length 4
  Top Layer w0.3: U4.16 45.568,26.314 J5.1
MOSI: J5.2 U4.15 | length 5.5
  Top Layer w0.3: U4.15 46.425,24.864 46.425,26.003 47.137,26.716 48.509,26.716 J5.2
NetC4_2: C4.2 C5.2 R4.2 U2.8 | length 11.5
  Top Layer w0.381: C4.2 4.75,30.886 5.915,29.721 C5.2 ; R4.2 7.137,29.823 C5.2 ; U2.8 9.591,31.132 8.5,30.041 7.559,30.041 C5.2
NetC8_1: C8.1 U2.6 | length 6.1
  Top Layer w0.381: U2.6 10.891,33.49 12.052,34.651 12.052,35.547 C8.1
NetC8_2: C8.2 U2.5 | length 3.3
  Top Layer w0.381: U2.5 11.541,32.918 12.189,33.566 13.068,33.566 C8.2
NetC11_1: C11.1 IC1.4 R5.1 R6.2 | length 19.4
  Top Layer w0.3: C11.1 14.681,16.612 15.787,15.506 20.379,15.506 20.777,15.904 20.777,18.56 20.927,18.71 IC1.4 ; R6.2 20.928,14.326 R5.1 21.055,15.088 22.352,16.384 22.352,17.653 21.445,18.56 21.1,18.56 IC1.4@20.96,18.7
NetC17_2: C17.2 U4.20
NetC18_2: C18.2 U4.7 Y1.3 | length 7.6
  Top Layer w0.3: U4.7 54.291,22.557 55.601,21.247 56.782,22.428 57.452,22.428 58.522,23.498 Y1.3
NetC19_2: C19.2 U4.8 Y1.1 | length 5.9
  Top Layer w0.3: U4.8 52.85,23.357 53.01,23.517 C19.2 53.353,24.968 54.233,25.848 Y1.1
NetIC3_2: IC3.2 J7.1 | length 22.8
  Top Layer w0.28: IC3.2 18.566,36.821 18.566,37.104 18.58,37.252 18.955,37.627 18.955,39.192 v1(18.847,39.751)
  Bottom Layer w0.3: v1@18.872,39.776 19.964,38.684 33.43,38.684 J7.1@36.326,41.58
NetIC3_3: IC3.3 J7.2 | length 26.3
  Top Layer w0.28: v1(17.348,39.014) 17.42,38.942 17.42,38.014 18.053,37.381 18.053,36.268 IC3.3
  Bottom Layer w0.3: v1@17.374,38.761 17.729,38.761 18.542,37.948 35.219,37.948 J7.2@38.838,41.567
NetIC3_4: IC3.4 J7.3 | length 38.8
  Top Layer w0.28: v1(16.232,37.487) 16.366,37.353 17.317,37.353 17.556,37.114 17.556,37.033 17.556,36.265 IC3.4
  Bottom Layer w0.3: v1(16.232,37.487) 16.232,36.215 20.7,31.748 27.079,31.748 28.174,30.653 28.423,30.653 32.613,34.843 40.047,34.843 41.351,36.148 J7.3
NetIC3_9: IC3.9 R8.1 | length 6.2
  Top Layer w0.28: IC3.9 18.553,31.868 18.553,32.97 18.907,33.325 19.512,33.325 19.888,32.949 19.888,29.872 R8.1
NetJ1_1: J1.1 R2.1 U1.1 | length 19.3
  Top Layer w0.3: J1.1 16.551,40.547 16.551,39.615 15.244,38.308 15.244,37.077 16.277,36.044 16.277,34.701 16.815,34.163 19.807,34.163 21.594,32.376 21.594,31.035 21.677,30.953 20.955,30.231 20.955,27.567 21.265,27.257 R2.1@21.844,27.257
NetJ2_1: J2.1 U1.5 | length 11.4
  Top Layer w0.381: U1.5 25.288,33.924 27.965,36.601 J2.1
NetJ2_2: J2.2 U1.4 | length 14.2
  Top Layer w0.381: U1.4 24.257,31.623 30.505,37.871 J2.2
NetJ3_1: J3.1 U3.5 | length 6.4
  Top Layer w0.4: U3.5 21.343,8.502 J3.1
NetJ3_2: J3.2 U3.4 | length 6.3
  Top Layer w0.4: U3.4 19.043,8.262 J3.2
NetJ4_3: J4.3 U4.28 | length 15.7
  Top Layer w0.3: J4.3 47.968,9.156 U4.28
NetJ4_4: J4.4 U4.27 | length 16.9
  Top Layer w0.3: J4.4 39.459,3.148 40.41,3.148 47.168,9.906 U4.27
NetR1_2: R1.2 U1.8 | length 4
  Top Layer w0.254: U1.8 21.677,35.488 23.195,37.006 R1.2
NetR3_2: R3.2 U1.7 | length 5.6
  Top Layer w0.3: U1.7 22.358,33.956 22.358,35.134 23.012,35.789 24.466,35.789 25.658,36.981 R3.2
NetR6_1: R6.1 U3.1 U3.7 | length 7.8
  Top Layer w0.26: R6.1 15.404,13.881 15.404,13.39 15.652,13.142 18.102,13.142 19.127,12.118 19.958,12.118 20.439,11.636 20.444,11.636 20.489,11.591 21.304,11.591 U3.7
REF: C7.2 R8.2 R9.1 U2.3 | length 10.3
  Top Layer w0.3: R9.1@17.221,26.626 17.546,26.301 17.546,25.776 v1(18.364,24.958) 18.613,24.958 19.131,25.476 19.131,26.174 19.556,26.599 19.583,26.599 R8.2@19.787,26.396
  Bottom Layer w0.3: v1(13.691,26.829) 13.953,26.829 14.233,26.549 14.345,26.549 15.951,24.943 v1@18.449,24.943
RESET: C15.2 J5.4 R7.1 S1.A1 U4.29 | length 51.6
  Top Layer w0.3: R7.1 32.993,3.072 37.851,7.929 37.851,12.247 39.195,13.592 39.881,13.592 v1(40.005,13.716)
  Bottom Layer w0.3: v1(40.005,13.716) 40.082,13.641 42.493,13.641 v1@47.724,18.872 ; v1@47.725,18.873 47.725,26.205 48.308,26.788 48.341,26.788 48.582,27.029 48.582,29.331 J5.4@49.832,30.582
  other v1: 47.727,18.872
SCK: J5.3 U4.17 | length 9.5
  Top Layer w0.254: U4.17 44.051,23.357 43.053,24.355 43.053,26.365 v1(45.263,28.575)
  Bottom Layer w0.254: v1(45.263,28.575) 45.276,28.575 47.282,30.582 J5.3
V_bridge_fil: C2.2 C5.1 R2.2 U2.1 | length 20.6
  Top Layer w0.254: C5.1 7.285,26.875 7.285,24.453 8.313,23.425 16.11,23.425 16.677,23.992 21.659,23.992 R2.2
  Top Layer w0.3: R2.2@21.844,24.203 22.247,23.8 C2.2@24.536,23.8
VCC: C1.2 C3.2 C9.2 C12.2 C14.2 C16.2 C21.2 C22.2 IC1.5 IC2.2 IC3.1 J1.4 J4.2 J5.5 R1.1 R7.2 U1.2 U2.7 U3.2 U4.4 U4.6 U4.18 | length 216.3
  Top Layer w0.381: U2.7 10.241,32.934 9.739,33.436 9.639,33.436 C3.2 9.824,33.627 10.853,34.656 10.853,34.907 v1(11.024,35.077)
  Top Layer w0.4: J1.4@9.084,40.589 6.782,40.589 3.302,37.109 3.302,16.51 5.817,13.995 8.585,13.995 10.312,12.268 IC2.2@11.887,12.268 ; J1.4 11.43,42.926 22.352,42.926 23.47,41.808 R1.1 23.195,40.006 22.327,39.138 22.327,38.1 21.76,37.534 21.306,37.534 C22.2 ; C9.2 16.51,11.605 16.51,9.855 15.977,9.322 15.977,7.81 17.257,6.53 17.257,6.447 R7.2@17.632,6.072 ; R7.2 R7.2@17.632,6.072 ; C1.2@22.12,28.606 22.395,28.331 22.486,28.331 23.233,27.584 27.051,27.584 27.594,28.128 27.594,28.889 v1(27.761,29.055) ; C12.2 23.467,20.428 24.943,18.951 v1(24.943,18.923) ; U4.18 45.966,22.557 46.45,22.073 v1(46.685,22.073) ; 47.236,21.757 U4.6 ; C14.2 55.523,13.682 45.157,3.316 44.627,3.316 J4.2 44.435,2.91 43.278,1.753 16.815,1.753 15.773,2.794 15.773,4.597 16.873,5.697 17.257,5.697 R7.2@17.632,6.072
  Bottom Layer w0.4: J1.4@9.102,40.039 11.1,38.041 v1@11.1,35.154 ; v1(11.024,35.077) 11.125,35.077 13.119,33.083 13.119,30.188 14.173,29.134 18.644,29.134 22.174,25.603 ; v1(24.943,18.923) 24.892,18.974 24.892,21.082 22.174,23.8 22.174,25.603 ; v1@27.686,29.134 32.842,34.29 45.748,34.29 46.916,33.122 J5.5 47.295,32.743 46.875,32.323 46.875,32.22 43.917,29.261 43.917,25.578 46.58,22.914 46.58,22.178 v1(46.685,22.073) ; v1(27.761,29.055) 27.608,29.055 24.155,25.603 22.174,25.603
VCC1: C20.2 IC2.1 J6.1
pads on no net: IC3.5 IC3.6 IC3.7 IC3.8 S1.B1 S1.D1 U4.1 U4.2 U4.9 U4.10 U4.11 U4.12 U4.13 U4.14 U4.19 U4.22 U4.23 U4.24 U4.26 U4.30 U4.31 U4.32

## Other copper
Top Layer:
  region net VCC1: 8.383,3.404 8.382,3.404 9.906,3.404 9.906,4.927 7.671,7.267 7.671,10.618 6.248,10.618 6.248,5.512
  region net VCC: 41.351,21.819 41.351,23.876 42.189,23.876 43.231,22.835 45.085,22.835 45.085,22.276 42.723,22.276 42.266,21.819
  region net VCC: 23.927,21.666 23.901,21.641 22.682,21.641 22.682,21.488 22.098,20.955 22.073,20.93 20.371,20.93 20.371,20.32 22.809,20.32 22.809,19.964 23.978,19.964 23.978,21.692
  region net VCC: 21.844,37.744 19.558,37.744 18.923,37.109 18.923,35.611 19.253,35.611 19.253,36.779 21.971,36.779 21.971,37.744
  region net VCC: 10.947,8.103 10.947,13.335 12.649,13.335 12.649,10.516 12.217,10.084 12.217,8.103
  region net VCC: 16.104,10.82 17.221,10.82 17.755,11.354 19.837,11.354 19.837,11.76 17.643,11.76 17.501,11.989 17.048,12.548 16.104,12.548
  region net VCC: 21.666,28.042 22.53,28.042 22.53,32.487 22.123,32.487 22.123,30.15 21.666,29.693 21.666,28.219
  region net VCC1: 6.274,10.185 6.274,13.386 6.553,13.386 8.407,13.386 8.407,10.871 7.709,10.173 6.286,10.173
  region net REF: 12.195,27.61 11.1,28.245 11.1,30.201 10.693,30.201 10.693,25.903 12.195,25.903
  region net REF: 11.709,27.61 14.402,27.61 14.402,25.883 11.709,25.883
  region net V_bridge_fil: 9.373,29.845 9.398,29.87 9.398,30.226 9.804,30.226 9.804,28.702 9.474,28.702 9.373,28.804
  region net V_bridge_fil: 9.804,30.168 9.804,28.702 9.144,28.702 8.179,27.737 8.179,26.391 6.325,26.391 6.35,26.416 6.326,27.4
  region net "Amplifier Input": 17.856,21.26 17.831,21.285 17.602,21.514 17.602,23.393 19.152,23.393 19.152,20.168 17.882,20.168 17.856,20.193 17.856,21.082
  region net "Amplifier Input": 13.691,19.71 13.691,21.006 19.075,21.006 19.075,20.168 15.494,20.168 15.494,19.71
  region net VCC: 54.305,20.019 54.204,22.047 53.569,22.047 51.613,22.047 51.613,21.463 53.518,21.463 53.797,21.184 53.797,20.422
  region net VCC: 55.118,17.17 53.899,18.39 53.899,19.863 51.765,19.863 51.765,20.422 54.28,20.422 55.321,19.38 55.982,19.38 55.982,19.075 55.982,17.12 55.194,17.12 55.118,17.12
  region net RESET: 48.463,17.323 47.092,18.39 47.092,19.583 47.777,19.583 48.539,19.583 49.073,19.583 49.073,17.323
  region net RESET: 48.514,12.751 48.514,17.323 49.047,17.323 49.047,15.243 50.241,13.979 50.241,12.751
  region net NetC17_2: 41.148,21.234 45.11,21.234 45.11,20.676 43.147,20.676 42.088,19.152 41.148,19.152
  region net IA_Input: 14.58,28.118 12.04,28.118 11.328,28.829 11.328,30.226 11.786,30.226 11.786,29.312 14.58,29.312

## Silkscreen, mask and mechanical layers (free items; w line width, h text height)
Board Shape:
  lines w0.2: 16.247,44.831 2.009,44.831 ccw(c2.009,42.923) 0.101,42.923 0.089,32.661 1.713,31.033 1.692,13.759 0.064,12.136 0.051,1.873 ccw(c1.941,1.873) 1.941,-0.017 59.001,-0.101 ccw(c59.001,1.748) 60.85,1.748 60.849,12.048 62.688,13.888 62.686,30.808 60.846,32.648 60.844,42.948 ccw(c58.961,42.948) 58.961,44.831 44.723,44.831 16.247,44.831 ; 16.247,44.831 16.247,44.831